# Altium PCB B车模摄像头.PcbDoc (part 1 of 2)
Units mil, origin at the board's own origin, x right, y up, seen from the top; angles counter-clockwise.
Board outline 3935.06 x 1885.03 mil, 2 copper layers (Top Layer, Bottom Layer); 34 components, 50 nets, 260 pads, 36 vias.
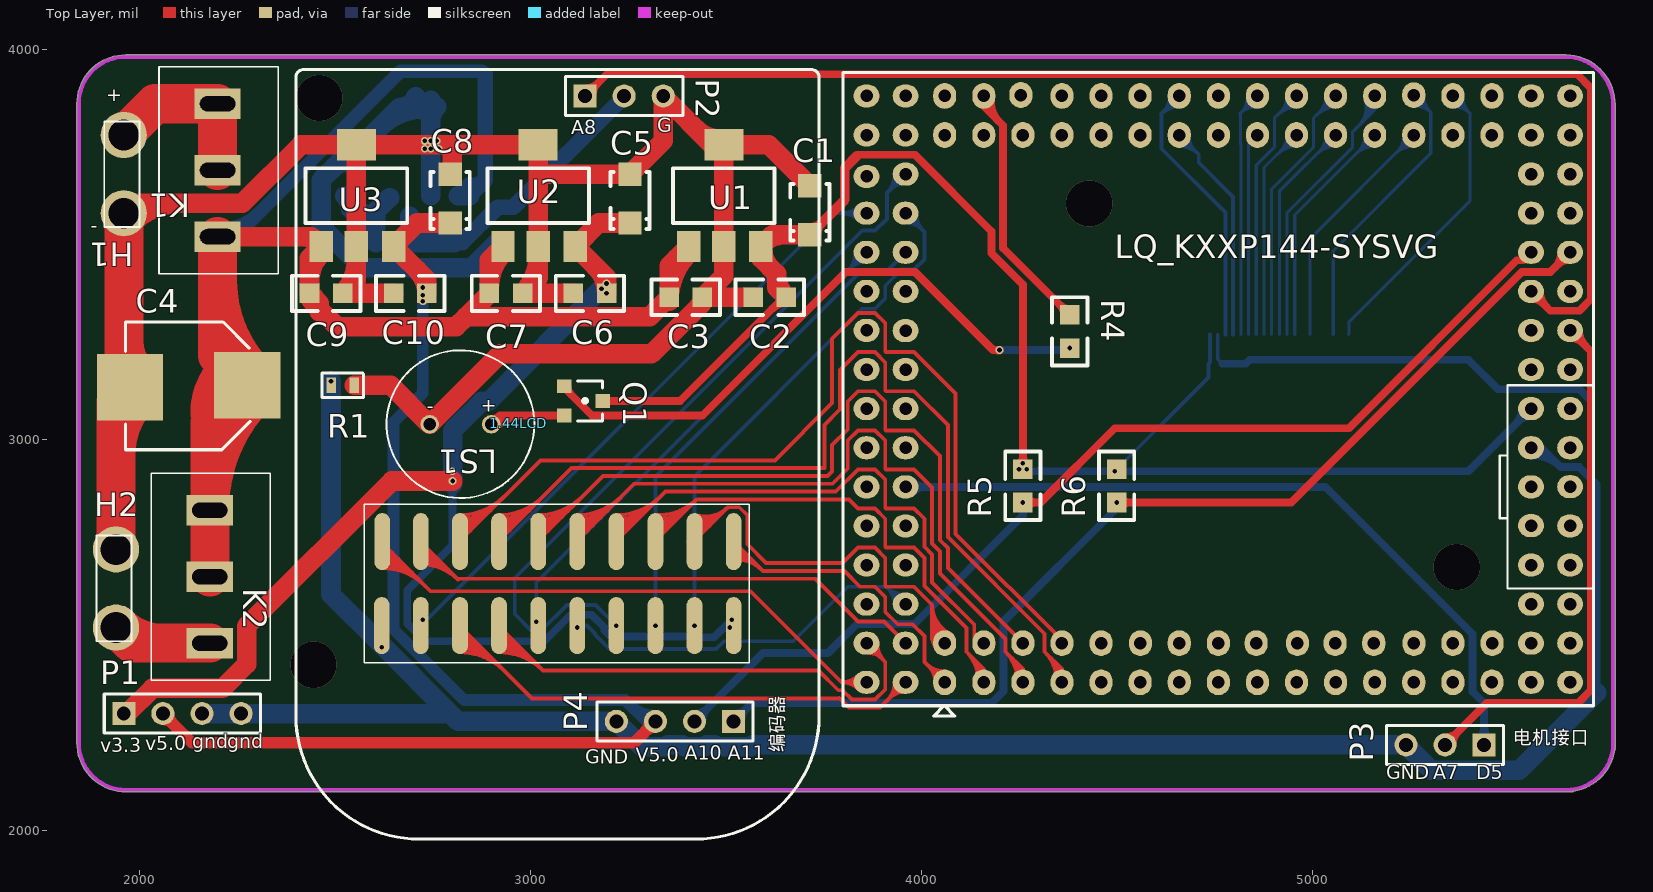
[diagram p0: Top Layer view]
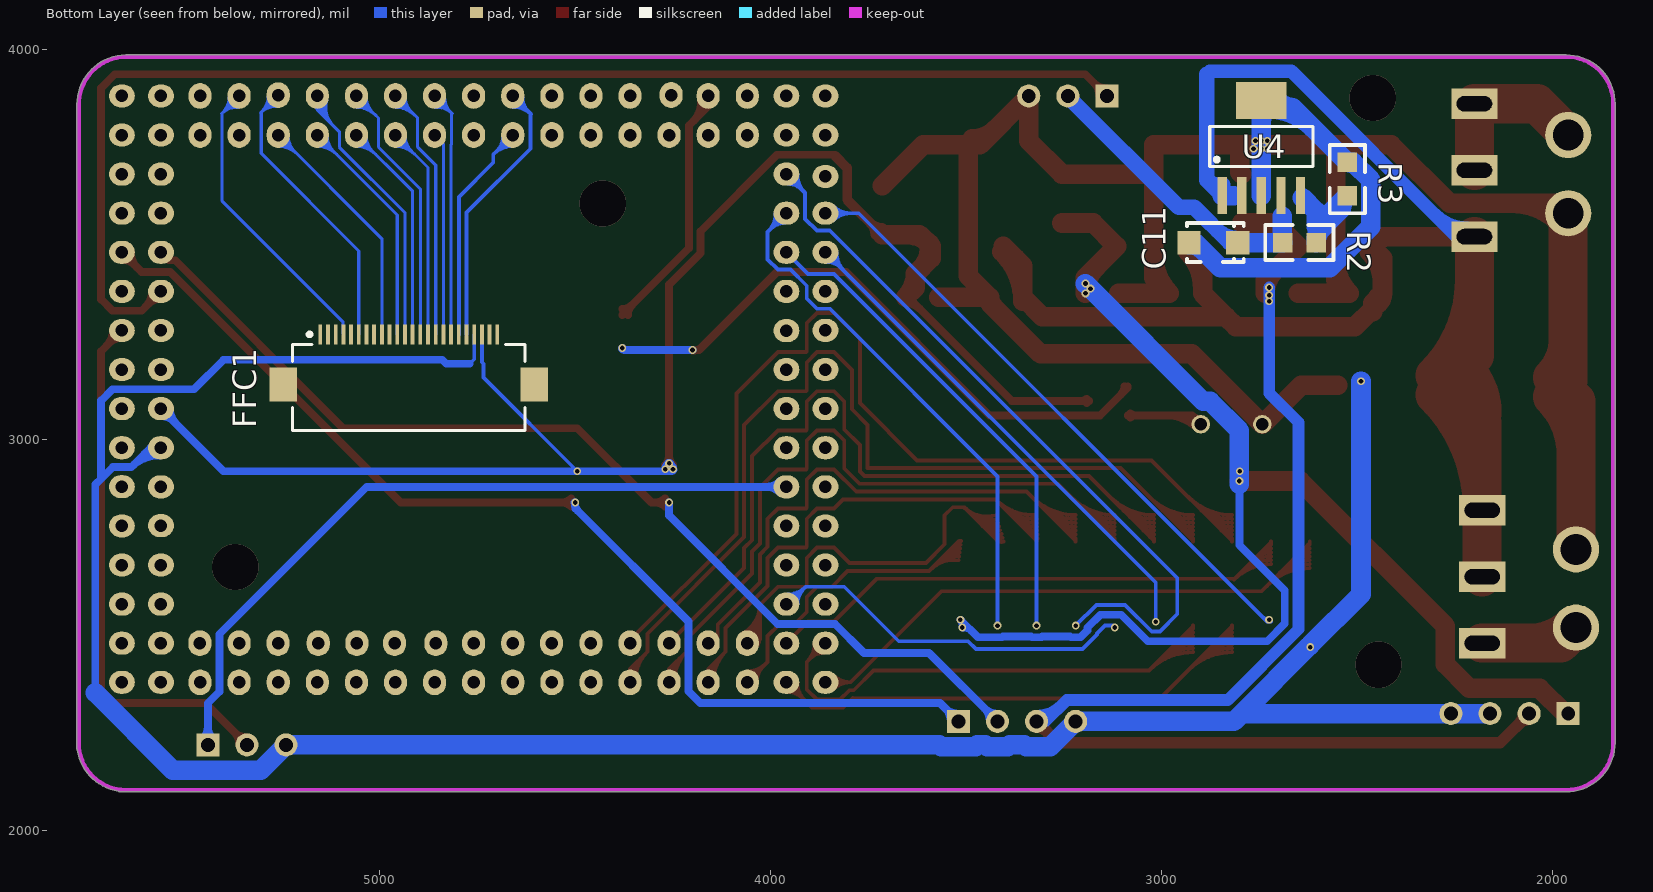
[diagram p1: Bottom Layer view, seen from below]

## Layer stack, top to bottom
Top Layer: signal copper 1.4
Dielectric: dielectric 12.6, FR-4, Dk 4.8
Bottom Layer: signal copper 1.4

## Board outline
1839.98,2225 1839.98,3860 cw(c1965,3860) 1965,3985.01 5650,3985.01 cw(c5650,3980) 5650.1,3985.01 cw(c5647.5,3857.5) 5775.04,3857.5 cw(c5647.5,3857.5) 5775.02,3854.95 cw(c5647.5,3857.5) 5775.01,3854.9 5775.02,3855 5775.02,2210 cw(c5770,2210) 5773.65,2206.56 cw(c5650,2225) 5668.44,2101.35 cw(c5665,2105) 5665,2099.99 1965,2099.99 cw(c1965,2225)

## Design rules (kind name [scope] priority, off if disabled: settings)
Clearance [All] p1: gap=10
PolygonConnect [All] p1: connectstyle=Relief reliefconductorwidth=10 reliefentries=4 polygonreliefangle="90 Angle"
RoutingVias [All] p1: holewidth=28 width=50 viastyle="Through Hole" minholewidth=28 minwidth=50 maxholewidth=28 maxwidth=50
SilkscreenOverComponentPads [All] p1: minsilkscreentomaskgap=10
SolderMaskExpansion [All] p1: expansion=4
TestPointUsage [All] p1: valid=0 allowmultiple=FALSE
Testpoint [All] p1: side=15 testpointundercomponent=TRUE minsize=40 maxsize=100 preferedsize=60 minholesize=0 maxholesize=40 preferedholesize=32 testpointgrid=1 style=1023 order=0-112345678
Width [All] p1: maxlimit=100 minlimit=8 preferedwidth=10
23 further rules are at their usual default settings.

## Components (designator, comment, footprint, x,y, rotation, side; value= is the part's Value field where it differs from the comment)
1.44LCD "1.44LCD" 1.44LCD 2400,1980 r0 top
C1 "47uF" 3216 3715,3525 r90 top
C2 "0.1uF" 0805 3655,3365 r180 top
C3 "0.1uF" 0805 3355,3365 r0 top
C4 "Cap Pol1" 470UF 2120,3140 r0 top
C5 "47uF" 3216 3255,3555 r90 top
C6 "0.1uF" 0805 3195,3375 r180 top
C7 "0.1uF" 0805 2895,3375 r0 top
C8 "47uF" 3216 2795,3555 r90 top
C9 "0.1uF" 0805 2435,3375 r0 top
C10 "0.1uF" 0805 2735,3375 r180 top
C11 "10uF" 3216 2805,3505 r0 bottom
FFC1 "FFC_0.5_24" 摄像头软排 4940,3140 r0 bottom
H1 "电源端子" 端子 1960,3580 r90 top (schematic designator *H1)
H2 "电机端子" 端子 1940,2520 r90 top (schematic designator *H2)
K1 "钮子开关" 钮子开关 2200,3860 r270 top
K2 "钮子开关" 钮子开关 2180,2820 r270 top
LQ_KXXP144-SYSVG "LQ_KXXP144-SYSVG" LQ_KXXP144-SYSVG 4060,2380 r0 top
LS1 "0905小型蜂鸣器" 0905小型蜂鸣器 2900,3040 r180 top
P1 "Header 4" HDR1X4 1960,2300 r0 top
P2 "Header 3" HDR1X3 3140,3880 r0 top
P3 "MOTO" HDR1X3 5440,2220 r180 top
P4 "编码器" HDR1X4 3520,2280 r180 top
Q1 "npn" npn 3180,3100 r270 top
R1 "R-0603" "R-0603 - duplicate1" 2520,3140 r0 top
R2 "3.3k" 0805 2605,3505 r0 bottom
R3 "1k" 0805 2525,3625 r90 bottom
R4 "1k" 0805 4380,3320 r270 top
R5 "10k" 0805 4260,2840 r90 top
R6 "10k" 0805 4500,2840 r90 top
U1 "LM2940S-3.3" LM2940S-5.0 3495,3625 r0 top
U2 "LM2940S-3.3" LM2940S-5.0 3020,3625 r0 top
U3 "LM2940S-5.0" LM2940S-5.0 2555,3625 r0 top
U4 "TL1963" SOT223-5 2745,3625 r180 bottom

## Footprints (in the part's own frame and the unit in brackets; to place one, negate y for a bottom-side part, rotate by r counter-clockwise, add the part's x,y. Pads: shape width x height; smd on the part's side, far side on the other; paste and mask are expansions set on the pad)
1.44LCD [mm]
  round 0 all layers, no hole: 0(5,3.989) 0(5,8.989) 0(29,3.989) 0(29,8.989)
  round 0.2 on Mech1: 1(0,49.489) 1(0.005,49.475) 1(0.5,49.989) 1(0.505,49.975)
  round 0 on Mech1: 1(5.07,20.597)
  oval 1.02x3.7 smd: 1(5.618,19.304) 2(8.128,19.304) 3(10.668,19.304) 4(13.208,19.304) 5(15.748,19.304) 6(18.288,19.304) 7(20.828,19.304) 8(23.368,19.304) 9(25.908,19.304) 10(28.448,19.304) 11(5.588,13.843) 12(8.128,13.843) 13(10.668,13.843) 14(13.208,13.843) 15(15.748,13.843) 16(18.288,13.843) 17(20.828,13.843) 18(23.368,13.843) 19(25.908,13.843) 20(28.448,13.843)
  silkscreen extent 0,-0.02 34,49.98
470UF [mm]
  rect 4.3x4.3 smd: 1(3.962,0) 2(-3.658,-0.127)
  silkscreen extent -3.96,-4.19 4.15,4.11, body extent -5,-4.41 4.7,4.09, height 10.3
0805 [mil]
  rect 50x50 smd: 1(0,0) 2(85,0)
  silkscreen extent -45,-45 130,45
0905小型蜂鸣器 [mm] "0905小蜂鸣器"
  round 1.2 hole 0.8: 1(0,0) 2(4,0)
  silkscreen extent -2.8,-4.81 6.8,4.79
3216 [mil]
  rect 60x60 smd: 1(0,0) 2(125,0)
  silkscreen extent -15,-50 130,50
HDR1X3 [mm] "Connector; Header; 3 Position"
  rect 1.5x1.5 hole 0.9: 1(0,0)
  round 1.5 hole 0.9: 2(2.54,0) 3(5.08,0)
  silkscreen extent -1.27,-1.27 6.35,1.27
HDR1X4 [mm] "Connector; Header; 4 Position"
  rect 1.5x1.5 hole 0.9: 1(0,0)
  round 1.5 hole 0.9: 2(2.54,0) 3(5.08,0) 4(7.62,0)
  silkscreen extent -1.27,-1.27 8.89,1.27
LM2940S-5.0 [mil]
  rect 60x80 smd: 1(-90,-130) 2(0,-130) 3(95,-130)
  rect 100x80 smd: 4(0,130)
  silkscreen extent -130,-70 130,70
LQ_KXXP144-SYSVG [mil]
  oval 59x66 hole 32: 1(0,0) 2(0,100) 3(100,0) 4(100,100) 5(200,0) 6(200,100) 7(300,0) 8(300,100) 9(400,0) 10(400,100) 11(500,0) 12(500.79,100) 13(600,0) 14(600,100) 15(700,0) 16(700,100) 17(800,0) 18(796.85,100) 19(900,0) 20(902.36,100) 21(1000,0) 22(998.82,100) 23(1100,0) 24(1097.64,100) 25(1200,0) 26(1200.39,100) 27(1300,0) 28(1300,100) 29(1400,0) 30(1400.39,100) 63(1400,1500) 64(1400,1400) 65(1300,1500) 66(1300,1400) 67(1200,1501.97) 68(1200,1400) 69(1100,1500) 70(1100,1400) 71(1000,1500) 72(1000,1400) 73(900,1500) 74(900,1400) 75(800,1500) 76(800,1400) 77(700,1500) 78(700,1400) 79(600,1500) 80(600,1400) 81(500,1500) 82(500,1400) 83(400,1500) 84(400,1400) 85(300,1500) 86(300,1400) 87(194.88,1502.36) 88(200,1400) 89(100,1500) 90(100,1400) 91(0,1500) 92(0,1400)
  oval 66x59 hole 32: 31(1500,0) 32(1600,0) 33(1500,100) 34(1600,100) 35(1500,200) 36(1600,200) 37(1500,300) 38(1600,300) 39(1500,400.79) 40(1600,400) 41(1500,500) 42(1600,500.39) 43(1500,600) 44(1600,600) 45(1500,700) 46(1600,700) 47(1500,800) 48(1600,800) 49(1500,900) 50(1600,900) 51(1500,1000) 52(1600,1000) 53(1500,1100) 54(1600,1100) 55(1500,1200) 56(1600,1200) 57(1500,1300) 58(1600,1300) 59(1500,1400) 60(1600,1400) 61(1500,1500) 62(1600,1500) 93(-100,1500) 94(-200,1500) 95(-100,1400) 96(-200,1400) 97(-100,1300) 98(-200,1294.09) 99(-100,1200) 100(-200,1200) 101(-100,1100) 102(-200,1100) 103(-100,1000) 104(-200,1000) 105(-100,899.61) 106(-200,900.39) 107(-100,800) 108(-200,800) 109(-100,700) 110(-200,700) 111(-100,600) 112(-200,600) 113(-100,500) 114(-200,500) 115(-100,400) 116(-200,400) 117(-100,300) 118(-200,300) 119(-100,200) 120(-200,200) 121(-100,100) 122(-200,100) 123(-100,0) 124(-200,0)
  silkscreen extent -260,-87 1660,1560
npn [mm]
  rect 0.9x0.95 smd: 1(0,0.127) 2(-0.95,-2.373) 3(0.95,-2.373)
  silkscreen extent -1.3,-1.5 1.3,0.13
"R-0603 - duplicate1" [mm]
  rect 0.6x1 smd: 1(-0.75,0) 2(0.75,0)
  silkscreen extent -1.35,-0.8 1.35,0.8
SOT223-5 [mm]
  rect 0.6x2.4 smd: 1(-2.54,0) 2(-1.27,0) 3(0,0) 4(1.27,0) 5(2.54,0)
  rect 3.3x2.4 smd: 6(0,6.181)
  silkscreen extent -3.35,1.88 3.35,4.48, body extent -3.28,-0.43 3.27,6.83, height 2.05
摄像头软排 [mm]
  rect 1.8x2.2 smd: 0(-8.514,-0.051) 0(7.802,-0.051)
  rect 0.25x1.3 smd: 1(5.394,-3.301) 2(4.894,-3.301) 3(4.394,-3.301) 4(3.894,-3.301) 5(3.394,-3.301) 6(2.894,-3.301) 7(2.394,-3.301) 8(1.894,-3.301) 9(1.394,-3.301) 10(0.894,-3.301) 11(0.394,-3.301) 12(-0.106,-3.301) 13(-0.606,-3.301) 14(-1.106,-3.301) 15(-1.606,-3.301) 16(-2.106,-3.301) 17(-2.606,-3.301) 18(-3.106,-3.301) 19(-3.606,-3.301) 20(-4.106,-3.301) 21(-4.606,-3.301) 22(-5.106,-3.301) 23(-5.606,-3.301) 24(-6.106,-3.301)
  silkscreen extent -7.91,-3.43 7.19,2.95, body extent -9.11,-3.08 8.39,2.25, height 2.08
端子 [mm]
  round 3 hole 2: 1(0,0) 2(5.08,0)
  silkscreen extent -0.89,-1.02 5.97,1.27
钮子开关 [mm] "102"
  rect 2x3 hole 1 slot 2.3 at 90 deg: 1(0,0) 2(4.318,0) 3(8.636,0)
  silkscreen extent -2.41,-3.81 11.05,3.94

## Part data
C1 C5 C8: library part CAP-TAN-47uF
C2 C3 C6 C7 C9 C10: library part CAP-0805_1
C4: "Polarized Capacitor (Radial)"
C11: library part CAP-TAN-10uF
FFC1: "FFC"
H1 H2: library part 端子5MM
K1 K2: "钮子开关102"
LS1: "0905小蜂鸣器"
P1: "Header, 4-Pin"
P2: "Header, 3-Pin"
P3: library part "Header 3", "Header, 3-Pin"
P4: library part "Header 4", "Header, 4-Pin"
R2 R3 R4 R5 R6: library part RES-0805
U1 U2: library part LM2940S-5.0

## Via types
v1: diameter 20, hole 12, Top Layer to Bottom Layer, 32 vias
v2: diameter 118.11, hole 118.11, Top Layer to Bottom Layer, 4 vias

## Nets (pads, with @x,y where several pads share a name; then routed paths per layer and width w, separated by ;. In a path a pad name is that pad's centre, name@x,y a point inside that pad or via, vN(x,y) a via of type N, cw(c..) or ccw(c..) an arc to the next point about the centre after c; other vN are vias at no path point)
AGND: C1.2 C2.2 C3.2 C4.2 C5.2 C6.2 C7.2 C8.2 C9.2 C10.2 C11.2 H1.1 H2.2 LS1.2 P2.3 R1.2 R3.2 U1.2 U1.4 U2.2 U2.4 U3.2 U3.4 U4.3 U4.6 | length 10305.7
  Top Layer w50: H1.1@1960,3580 1985,3605 2262.92,3605 2412.92,3755 U3.4@2555,3755 ; R1.2@2549.53,3140 2642.52,3140 LS1.2@2742.52,3040 2922.52,3220 3309.5,3220 3440,3350.5 C3.2@3440,3365 ; C10.2@2650,3375 C9.2@2520,3375 ; C8.2@2795,3680 2800,3685 2800,3755 ; C6.2@3110,3375 C7.2@2980,3375 ; C2.2@3570,3365 C3.2@3440,3365 ; C1.2@3715,3650 3610,3755 U1.4@3495,3755 ; H1.1@1984.08,3555.92 cw(c2102.57,3437.43) 2102.57,3605 ; H1.1@1984.08,3555.92 cw(c2102.57,3437.43) 2102.57,3605 ; H1.1@1984.08,3555.92 cw(c2102.57,3437.43) 2102.57,3605 ; C9.2@2520,3375 ccw(c2435.5,3459.5) U3.2@2555,3459.5 ; C9.2@2520,3375 ccw(c2435.5,3459.5) U3.2@2555,3459.5 ; C9.2@2520,3375 ccw(c2435.5,3459.5) U3.2@2555,3459.5 ; C9.2@2520,3375 2555,3410 U3.2@2555,3495 U3.4@2555,3755 ; U3.4@2555,3755 2800,3755 ; 2800,3755 U2.4@3020,3755 3020,3670 ; C7.2@2980,3375 ccw(c2883.43,3471.57) U2.2@3020,3471.57 ; C7.2@2980,3375 ccw(c2883.43,3471.57) U2.2@3020,3471.57 ; C7.2@2980,3375 ccw(c2883.43,3471.57) U2.2@3020,3471.57 ; C7.2@2980,3375 3020,3415 U2.2@3020,3495 3020,3670 ; 3020,3670 3030,3680 C5.2@3255,3680 3340,3765 P2.3@3340,3880 3465,3755 U1.4@3495,3755 ; 3425.25,3794.75 ccw(c3485,3854.5) U1.4@3485,3770 ; 3425.25,3794.75 ccw(c3485,3854.5) U1.4@3485,3770 ; 3425.25,3794.75 ccw(c3485,3854.5) U1.4@3485,3770 ; C3.2@3429.75,3340.25 ccw(c3405,3365) C3.2@3440,3365 ; C3.2@3429.75,3340.25 ccw(c3405,3365) C3.2@3440,3365 ; C3.2@3429.75,3340.25 ccw(c3405,3365) C3.2@3440,3365 ; C3.2@3440,3365 3495,3420 U1.2@3495,3495 U1.4@3495,3755
  Top Layer w100: H2.2@1935,2715 H2.2@1940,2720 1940,3099 C4.2@1976,3135 1960,3151 H1.1@1960,3580 ; 1940,2964.45 cw(c2146.55,2964.45) C4.2@2000.5,3110.5 ; 1940,2964.45 cw(c2146.55,2964.45) C4.2@2000.5,3110.5 ; 1940,2964.45 cw(c2146.55,2964.45) C4.2@2000.5,3110.5 ; 1960,3257.27 ccw(c2098.27,3257.27) C4.2@2000.5,3159.5 ; 1960,3257.27 ccw(c2098.27,3257.27) C4.2@2000.5,3159.5 ; 1960,3257.27 ccw(c2098.27,3257.27) C4.2@2000.5,3159.5
  Bottom Layer w50: U4.3@2745,3625 U4.6@2745,3868.35 2726.65,3850 2665,3850 ; C11.2@2930,3505 2914.5,3505 2849.5,3440 2570.5,3440 2465,3545.5 2465,3664.5 2510.5,3710 R3.2@2525,3710 ; R3.2@2500.25,3699.75 cw(c2525,3675) R3.2@2525,3710 ; R3.2@2500.25,3699.75 cw(c2525,3675) R3.2@2525,3710 ; R3.2@2500.25,3699.75 cw(c2525,3675) R3.2@2525,3710 ; R3.2@2525,3710 2665,3850 ; 2614.31,3799.31 cw(c2727.28,3686.33) U4.6@2727.28,3846.1 ; 2614.31,3799.31 cw(c2727.28,3686.33) U4.6@2727.28,3846.1 ; 2614.31,3799.31 cw(c2727.28,3686.33) U4.6@2727.28,3846.1 ; 2643.03,3828.03 cw(c2697.6,3773.46) U4.6@2720.64,3847.12 ; 2643.03,3828.03 cw(c2697.6,3773.46) U4.6@2720.64,3847.12 ; 2643.03,3828.03 cw(c2697.6,3773.46) U4.6@2720.64,3847.12 ; 2665,3850 ccw(c2665,3895.83) U4.6@2706.93,3877.33 ; 2665,3850 ccw(c2665,3895.83) U4.6@2706.93,3877.33 ; 2665,3850 ccw(c2665,3895.83) U4.6@2706.93,3877.33 ; U4.6@2729.27,3852.62 cw(c2691.3,3814.64) 2745,3814.64 ; U4.6@2729.27,3852.62 cw(c2691.3,3814.64) 2745,3814.64 ; U4.6@2729.27,3852.62 cw(c2691.3,3814.64) 2745,3814.64 ; 2745,3814.64 cw(c2798.7,3814.64) U4.6@2760.73,3852.62 ; 2745,3814.64 cw(c2798.7,3814.64) U4.6@2760.73,3852.62 ; 2745,3814.64 cw(c2798.7,3814.64) U4.6@2760.73,3852.62 ; 2895,3485.5 cw(c2930,3450.5) C11.2@2930,3500 ; 2895,3485.5 cw(c2930,3450.5) C11.2@2930,3500 ; 2895,3485.5 cw(c2930,3450.5) C11.2@2930,3500
  other v1: 2730,3745 2745,3745 2765,3745 2730,3765 2745,3765 2760,3765
DGND: 1.44LCD.11 FFC1.21 LQ_KXXP144-SYSVG.43 P1.3 P1.4 P3.3 P4.4 R1.1 | length 7055.5
  Bottom Layer w8: FFC1.21@4758.68,3269.98 4758.68,3206.32 4770,3195
  Bottom Layer w10: LQ_KXXP144-SYSVG.43@5557.65,2989.41 LQ_KXXP144-SYSVG.43@5560,2990
  Bottom Layer w20: 4770,3195 4830,3195 4840.33,3205.33 5399.67,3205.33 5475.5,3129.5 5684,3129.5 5713,3100.5 5713,2900.9 ; LQ_KXXP144-SYSVG.43@5560,2980 5586.5,2980 5636,2930.5 5683.4,2930.5 5713,2900.9 ; 5728,2353.28 5728,2885.9 5713,2900.9 ; LQ_KXXP144-SYSVG.43@5563.5,2960.5 cw(c5563.5,2857.9) 5636.05,2930.45 ; LQ_KXXP144-SYSVG.43@5563.5,2960.5 cw(c5563.5,2857.9) 5636.05,2930.45 ; LQ_KXXP144-SYSVG.43@5563.5,2960.5 cw(c5563.5,2857.9) 5636.05,2930.45 ; LQ_KXXP144-SYSVG.43@5563.5,2980.5 cw(c5563.5,2926.19) 5601.9,2964.59 ; LQ_KXXP144-SYSVG.43@5563.5,2980.5 cw(c5563.5,2926.19) 5601.9,2964.59 ; LQ_KXXP144-SYSVG.43@5563.5,2980.5 cw(c5563.5,2926.19) 5601.9,2964.59
  Bottom Layer w50: P1.3@2160,2300 P1.4@2260,2300 2795,2300 ; v1(2490,3150) 2490,3135 2490,2605 v1@2620,2475 ; v1@2622.5,2472.5 2795,2300 ; P3.3@5220,2220 3568.55,2220 3564.03,2215.47 3475.97,2215.47 3471.45,2220 3451.26,2220 3446.73,2215.47 3393.27,2215.47 3388.74,2220 3351.26,2220 3346.73,2215.47 3284.53,2215.47 P4.4@3220,2280 2815,2280 2795,2300 ; P3.3@5240,2220 5304.53,2155.47 5530.19,2155.47 5728,2353.28
  other v1: 2620,2470
Net*H1_2: H1.2 K1.1 K1.2 | length 443.1
  Top Layer w100: H1.2@1960,3780 2040,3860 K1.1@2200,3860 K1.2@2200,3690
NetC1_2: 
NetLS1_VCC: LS1.1 Q1.3 | length 688.5
  Top Layer w20: LS1.1@2900,3040 2922.6,3062.6 Q1.3@3086.57,3062.6 ; LS1.1@2895.49,3044.51 cw(c2939.16,3000.84) 2939.16,3062.6 ; LS1.1@2895.49,3044.51 cw(c2939.16,3000.84) 2939.16,3062.6 ; LS1.1@2895.49,3044.51 cw(c2939.16,3000.84) 2939.16,3062.6 ; LS1.1@2909.63,3030.37 cw(c2987.44,2952.56) 2987.44,3062.6 ; LS1.1@2909.63,3030.37 cw(c2987.44,2952.56) 2987.44,3062.6 ; LS1.1@2909.63,3030.37 cw(c2987.44,2952.56) 2987.44,3062.6 ; 3066.96,3062.6 cw(c3066.96,3043.97) Q1.3@3080.13,3057.14 ; 3066.96,3062.6 ccw(c3066.96,3081.23) Q1.3@3080.13,3068.05 ; 3066.96,3062.6 cw(c3066.96,3043.97) Q1.3@3080.13,3057.14 ; 3066.96,3062.6 ccw(c3066.96,3081.23) Q1.3@3080.13,3068.05 ; 3066.96,3062.6 cw(c3066.96,3043.97) Q1.3@3080.13,3057.14 ; 3066.96,3062.6 ccw(c3066.96,3081.23) Q1.3@3080.13,3068.05
NetQ1_2: Q1.2 R4.2 | length 1745.2
  Top Layer w20: Q1.2@3086.57,3137.4 3086.57,3133.72 3158.01,3062.28 3439.78,3062.28 3807,3429.5 3984,3429.5 4183.5,3230 v1(4200,3230) ; Q1.2@3095.28,3137.4 ccw(c3125.16,3137.4) 3104.03,3116.27 ; Q1.2@3095.28,3137.4 ccw(c3125.16,3137.4) 3104.03,3116.27 ; Q1.2@3095.28,3137.4 ccw(c3125.16,3137.4) 3104.03,3116.27 ; 4175.25,3238.25 ccw(c4200,3263) v1@4200,3228 ; 4175.25,3238.25 ccw(c4200,3263) v1@4200,3228 ; 4175.25,3238.25 ccw(c4200,3263) v1@4200,3228
  Bottom Layer w20: v1(4200,3230) 4375,3230 v1(4380,3235) ; v1@4372.76,3230 ccw(c4372.76,3242.24) v1@4381.41,3233.59 ; v1@4372.76,3230 ccw(c4372.76,3242.24) v1@4381.41,3233.59 ; v1@4372.76,3230 ccw(c4372.76,3242.24) v1@4381.41,3233.59
NetR2_1: R2.1 R3.1 U4.5 | length 924.6
  Bottom Layer w20: R3.1@2525,3625 2525,3585 R2.1@2605,3505 ; R3.1@2514.39,3614.39 cw(c2488.79,3588.79) 2525,3588.79 ; R3.1@2514.39,3614.39 cw(c2488.79,3588.79) 2525,3588.79 ; R3.1@2514.39,3614.39 cw(c2488.79,3588.79) 2525,3588.79 ; 2525,3588.79 cw(c2561.21,3588.79) R3.1@2535.61,3614.39 ; 2525,3588.79 cw(c2561.21,3588.79) R3.1@2535.61,3614.39 ; 2525,3588.79 cw(c2561.21,3588.79) R3.1@2535.61,3614.39 ; 2579.39,3530.61 cw(c2553.79,3505) R2.1@2590,3505 ; 2579.39,3530.61 ccw(c2605,3556.21) R2.1@2605,3520 ; 2579.39,3530.61 cw(c2553.79,3505) R2.1@2590,3505 ; 2579.39,3530.61 ccw(c2605,3556.21) R2.1@2605,3520 ; 2579.39,3530.61 cw(c2553.79,3505) R2.1@2590,3505 ; 2579.39,3530.61 ccw(c2605,3556.21) R2.1@2605,3520
  Bottom Layer w50: R3.1@2525,3625 2605,3545 2605,3585 U4.5@2640,3620 ; 2576.72,3573.28 cw(c2508.43,3505) R2.1@2605,3505 ; 2576.72,3573.28 cw(c2508.43,3505) R2.1@2605,3505 ; 2576.72,3573.28 cw(c2508.43,3505) R2.1@2605,3505
PTA7: LQ_KXXP144-SYSVG.50 P3.2 | length 1817.2
  Top Layer w20: P3.2@5340,2220 5447,2327 5680.5,2327 5713,2359.5 5713,3227 LQ_KXXP144-SYSVG.50@5660,3280 ; P3.2@5340,2239.53 ccw(c5340,2286.67) 5373.34,2253.34 ; P3.2@5340,2239.53 ccw(c5340,2286.67) 5373.34,2253.34 ; P3.2@5340,2239.53 ccw(c5340,2286.67) 5373.34,2253.34 ; P3.2@5359.53,2220 cw(c5406.67,2220) 5373.34,2253.34 ; P3.2@5359.53,2220 cw(c5406.67,2220) 5373.34,2253.34 ; P3.2@5359.53,2220 cw(c5406.67,2220) 5373.34,2253.34 ; LQ_KXXP144-SYSVG.50@5663.5,3260.5 cw(c5663.5,3221.87) 5690.81,3249.19 ; LQ_KXXP144-SYSVG.50@5663.5,3260.5 cw(c5663.5,3221.87) 5690.81,3249.19 ; LQ_KXXP144-SYSVG.50@5663.5,3260.5 cw(c5663.5,3221.87) 5690.81,3249.19 ; LQ_KXXP144-SYSVG.50@5683,3280 ccw(c5738.53,3280) 5699.26,3240.74 ; LQ_KXXP144-SYSVG.50@5683,3280 ccw(c5738.53,3280) 5699.26,3240.74 ; LQ_KXXP144-SYSVG.50@5683,3280 ccw(c5738.53,3280) 5699.26,3240.74
PTA8: LQ_KXXP144-SYSVG.51 P2.1 | length 3780.9
  Top Layer w20: P2.1@3140,3880 3195.36,3935.36 5678.14,3935.36 5713,3900.5 5713,3359.5 5684,3330.5 5609.5,3330.5 LQ_KXXP144-SYSVG.51@5560,3380 ; P2.1@3140,3899.53 ccw(c3140,3946.67) 3173.34,3913.34 ; P2.1@3140,3899.53 ccw(c3140,3946.67) 3173.34,3913.34 ; P2.1@3140,3899.53 ccw(c3140,3946.67) 3173.34,3913.34 ; P2.1@3159.53,3880 cw(c3206.67,3880) 3173.34,3913.34 ; P2.1@3159.53,3880 cw(c3206.67,3880) 3173.34,3913.34 ; P2.1@3159.53,3880 cw(c3206.67,3880) 3173.34,3913.34 ; LQ_KXXP144-SYSVG.51@5563.5,3360.5 cw(c5563.5,3321.87) 5590.81,3349.19 ; LQ_KXXP144-SYSVG.51@5563.5,3360.5 cw(c5563.5,3321.87) 5590.81,3349.19 ; LQ_KXXP144-SYSVG.51@5563.5,3360.5 cw(c5563.5,3321.87) 5590.81,3349.19 ; LQ_KXXP144-SYSVG.51@5583,3380 ccw(c5638.53,3380) 5599.26,3340.74 ; LQ_KXXP144-SYSVG.51@5583,3380 ccw(c5638.53,3380) 5599.26,3340.74 ; LQ_KXXP144-SYSVG.51@5583,3380 ccw(c5638.53,3380) 5599.26,3340.74
PTA10: LQ_KXXP144-SYSVG.53 P4.2 R5.1 | length 3049.5
  Top Layer w20: v1(4260,2840) 4305,2840 4495,3030 5094.07,3030 5523.57,3459.5 5539.5,3459.5 LQ_KXXP144-SYSVG.53@5560,3480 ; R5.1@4270.61,2829.39 cw(c4296.21,2803.79) 4296.21,2840 ; R5.1@4270.61,2829.39 cw(c4296.21,2803.79) 4296.21,2840 ; R5.1@4270.61,2829.39 cw(c4296.21,2803.79) 4296.21,2840 ; R5.1@4270.61,2850.61 ccw(c4296.21,2876.21) 4296.21,2840 ; R5.1@4270.61,2850.61 ccw(c4296.21,2876.21) 4296.21,2840 ; R5.1@4270.61,2850.61 ccw(c4296.21,2876.21) 4296.21,2840
  Bottom Layer w20: P4.2@3420,2280 3595,2455 3761.5,2455 3836,2529.5 3983,2529.5 4260,2806.5 v1(4260,2840) ; P4.2@3420,2299.53 ccw(c3420,2346.67) 3453.34,2313.34 ; P4.2@3420,2299.53 ccw(c3420,2346.67) 3453.34,2313.34 ; P4.2@3420,2299.53 ccw(c3420,2346.67) 3453.34,2313.34 ; P4.2@3439.53,2280 cw(c3486.67,2280) 3453.34,2313.34 ; P4.2@3439.53,2280 cw(c3486.67,2280) 3453.34,2313.34 ; P4.2@3439.53,2280 cw(c3486.67,2280) 3453.34,2313.34
PTA11: LQ_KXXP144-SYSVG.54 P4.1 R6.1 | length 3439
  Top Layer w20: v1(4500,2840) 4946.5,2840 5536,3429.5 5609.5,3429.5 LQ_KXXP144-SYSVG.54@5660,3480 ; R6.1@4510.61,2829.39 cw(c4536.21,2803.79) 4536.21,2840 ; R6.1@4510.61,2829.39 cw(c4536.21,2803.79) 4536.21,2840 ; R6.1@4510.61,2829.39 cw(c4536.21,2803.79) 4536.21,2840 ; R6.1@4510.61,2850.61 ccw(c4536.21,2876.21) 4536.21,2840 ; R6.1@4510.61,2850.61 ccw(c4536.21,2876.21) 4536.21,2840 ; R6.1@4510.61,2850.61 ccw(c4536.21,2876.21) 4536.21,2840 ; 5620.74,3440.74 ccw(c5581.47,3480) LQ_KXXP144-SYSVG.54@5637,3480 ; 5620.74,3440.74 ccw(c5581.47,3480) LQ_KXXP144-SYSVG.54@5637,3480 ; 5620.74,3440.74 ccw(c5581.47,3480) LQ_KXXP144-SYSVG.54@5637,3480 ; 5629.19,3449.19 cw(c5656.5,3421.87) LQ_KXXP144-SYSVG.54@5656.5,3460.5 ; 5629.19,3449.19 cw(c5656.5,3421.87) LQ_KXXP144-SYSVG.54@5656.5,3460.5 ; 5629.19,3449.19 cw(c5656.5,3421.87) LQ_KXXP144-SYSVG.54@5656.5,3460.5
  Bottom Layer w20: P4.1@3520,2280 3567,2327 4180.5,2327 4210.5,2357 4210.5,2535.5 4500,2825 v1(4500,2840) ; P4.1@3520,2299.53 ccw(c3520,2346.67) 3553.34,2313.34 ; P4.1@3520,2299.53 ccw(c3520,2346.67) 3553.34,2313.34 ; P4.1@3520,2299.53 ccw(c3520,2346.67) 3553.34,2313.34 ; P4.1@3539.53,2280 cw(c3586.67,2280) 3553.34,2313.34 ; P4.1@3539.53,2280 cw(c3586.67,2280) 3553.34,2313.34 ; P4.1@3539.53,2280 cw(c3586.67,2280) 3553.34,2313.34 ; 4492.81,2817.81 ccw(c4470.62,2840) v1@4502,2840 ; 4492.81,2817.81 ccw(c4470.62,2840) v1@4502,2840 ; 4492.81,2817.81 ccw(c4470.62,2840) v1@4502,2840
PTA27: FFC1.4 LQ_KXXP144-SYSVG.65 | length 1209.5
  Bottom Layer w8: FFC1.4@5093.32,3269.98 5094.09,3270.74 5094.09,3301.37 5403.5,3610.78 5403.5,3836.5 LQ_KXXP144-SYSVG.65@5360,3880 ; LQ_KXXP144-SYSVG.65@5361.19,3859.04 cw(c5363.97,3818.36) 5392.81,3847.19 ; LQ_KXXP144-SYSVG.65@5361.19,3859.04 cw(c5363.97,3818.36) 5392.81,3847.19 ; LQ_KXXP144-SYSVG.65@5361.19,3859.04 cw(c5363.97,3818.36) 5392.81,3847.19 ; LQ_KXXP144-SYSVG.65@5361.74,3851.06 cw(c5365.56,3795.07) 5405.25,3834.75 ; LQ_KXXP144-SYSVG.65@5361.74,3851.06 cw(c5365.56,3795.07) 5405.25,3834.75 ; LQ_KXXP144-SYSVG.65@5361.74,3851.06 cw(c5365.56,3795.07) 5405.25,3834.75 ; LQ_KXXP144-SYSVG.65@5377.5,3876.5 ccw(c5411.3,3876.5) 5387.4,3852.6 ; LQ_KXXP144-SYSVG.65@5377.5,3876.5 ccw(c5411.3,3876.5) 5387.4,3852.6 ; LQ_KXXP144-SYSVG.65@5377.5,3876.5 ccw(c5411.3,3876.5) 5387.4,3852.6 ; LQ_KXXP144-SYSVG.65@5385.5,3876.5 ccw(c5438.61,3876.5) 5401.06,3838.94 ; LQ_KXXP144-SYSVG.65@5385.5,3876.5 ccw(c5438.61,3876.5) 5401.06,3838.94 ; LQ_KXXP144-SYSVG.65@5385.5,3876.5 ccw(c5438.61,3876.5) 5401.06,3838.94
PTA28: FFC1.9 LQ_KXXP144-SYSVG.68 | length 1109
  Bottom Layer w8: FFC1.9@4994.9,3269.98 4994.9,3514.9 LQ_KXXP144-SYSVG.68@5260,3780 ; 5210.49,3730.49 cw(c5260,3680.99) LQ_KXXP144-SYSVG.68@5260,3751 ; 5210.49,3730.49 cw(c5260,3680.99) LQ_KXXP144-SYSVG.68@5260,3751 ; 5210.49,3730.49 cw(c5260,3680.99) LQ_KXXP144-SYSVG.68@5260,3751 ; 5218.94,3738.94 ccw(c5181.39,3776.5) LQ_KXXP144-SYSVG.68@5234.5,3776.5 ; 5218.94,3738.94 ccw(c5181.39,3776.5) LQ_KXXP144-SYSVG.68@5234.5,3776.5 ; 5218.94,3738.94 ccw(c5181.39,3776.5) LQ_KXXP144-SYSVG.68@5234.5,3776.5 ; 5224.15,3744.15 cw(c5260,3708.3) LQ_KXXP144-SYSVG.68@5260,3759 ; 5224.15,3744.15 cw(c5260,3708.3) LQ_KXXP144-SYSVG.68@5260,3759 ; 5224.15,3744.15 cw(c5260,3708.3) LQ_KXXP144-SYSVG.68@5260,3759 ; 5232.6,3752.6 ccw(c5208.7,3776.5) LQ_KXXP144-SYSVG.68@5242.5,3776.5 ; 5232.6,3752.6 ccw(c5208.7,3776.5) LQ_KXXP144-SYSVG.68@5242.5,3776.5 ; 5232.6,3752.6 ccw(c5208.7,3776.5) LQ_KXXP144-SYSVG.68@5242.5,3776.5
PTA29: FFC1.6 LQ_KXXP144-SYSVG.67 | length 1186.3
  Bottom Layer w8: FFC1.6@5053.95,3269.98 5053.95,3483.45 5303.5,3733 5303.5,3838.47 LQ_KXXP144-SYSVG.67@5260,3881.97 ; LQ_KXXP144-SYSVG.67@5261.19,3861.01 cw(c5263.97,3820.32) 5292.81,3849.16 ; LQ_KXXP144-SYSVG.67@5261.19,3861.01 cw(c5263.97,3820.32) 5292.81,3849.16 ; LQ_KXXP144-SYSVG.67@5261.19,3861.01 cw(c5263.97,3820.32) 5292.81,3849.16 ; LQ_KXXP144-SYSVG.67@5261.74,3853.03 cw(c5265.56,3797.04) 5305.25,3836.72 ; LQ_KXXP144-SYSVG.67@5261.74,3853.03 cw(c5265.56,3797.04) 5305.25,3836.72 ; LQ_KXXP144-SYSVG.67@5261.74,3853.03 cw(c5265.56,3797.04) 5305.25,3836.72 ; LQ_KXXP144-SYSVG.67@5277.5,3878.47 ccw(c5311.3,3878.47) 5287.4,3854.57 ; LQ_KXXP144-SYSVG.67@5277.5,3878.47 ccw(c5311.3,3878.47) 5287.4,3854.57 ; LQ_KXXP144-SYSVG.67@5277.5,3878.47 ccw(c5311.3,3878.47) 5287.4,3854.57 ; LQ_KXXP144-SYSVG.67@5285.5,3878.47 ccw(c5338.61,3878.47) 5301.06,3840.91 ; LQ_KXXP144-SYSVG.67@5285.5,3878.47 ccw(c5338.61,3878.47) 5301.06,3840.91 ; LQ_KXXP144-SYSVG.67@5285.5,3878.47 ccw(c5338.61,3878.47) 5301.06,3840.91
PTB0: FFC1.11 LQ_KXXP144-SYSVG.70 | length 1083.9
  Bottom Layer w8: FFC1.11@4955.53,3269.98 4955.53,3575.53 LQ_KXXP144-SYSVG.70@5160,3780 ; 5110.49,3730.49 cw(c5160,3680.99) LQ_KXXP144-SYSVG.70@5160,3751 ; 5110.49,3730.49 cw(c5160,3680.99) LQ_KXXP144-SYSVG.70@5160,3751 ; 5110.49,3730.49 cw(c5160,3680.99) LQ_KXXP144-SYSVG.70@5160,3751 ; 5118.94,3738.94 ccw(c5081.39,3776.5) LQ_KXXP144-SYSVG.70@5134.5,3776.5 ; 5118.94,3738.94 ccw(c5081.39,3776.5) LQ_KXXP144-SYSVG.70@5134.5,3776.5 ; 5118.94,3738.94 ccw(c5081.39,3776.5) LQ_KXXP144-SYSVG.70@5134.5,3776.5 ; 5124.15,3744.15 cw(c5160,3708.3) LQ_KXXP144-SYSVG.70@5160,3759 ; 5124.15,3744.15 cw(c5160,3708.3) LQ_KXXP144-SYSVG.70@5160,3759 ; 5124.15,3744.15 cw(c5160,3708.3) LQ_KXXP144-SYSVG.70@5160,3759 ; 5132.6,3752.6 ccw(c5108.7,3776.5) LQ_KXXP144-SYSVG.70@5142.5,3776.5 ; 5132.6,3752.6 ccw(c5108.7,3776.5) LQ_KXXP144-SYSVG.70@5142.5,3776.5 ; 5132.6,3752.6 ccw(c5108.7,3776.5) LQ_KXXP144-SYSVG.70@5142.5,3776.5
PTB1: FFC1.12 LQ_KXXP144-SYSVG.69 | length 1524.3
  Bottom Layer w8: FFC1.12@4935.84,3269.98 4935.84,3581.3 5103.5,3748.96 5103.5,3788.52 5160,3845.02 LQ_KXXP144-SYSVG.69@5160,3880 ; 5119.24,3804.26 ccw(c5073.13,3850.37) LQ_KXXP144-SYSVG.69@5135.58,3869.16 ; 5119.24,3804.26 ccw(c5073.13,3850.37) LQ_KXXP144-SYSVG.69@5135.58,3869.16 ; 5119.24,3804.26 ccw(c5073.13,3850.37) LQ_KXXP144-SYSVG.69@5135.58,3869.16 ; 5128.71,3813.73 ccw(c5087.68,3854.75) LQ_KXXP144-SYSVG.69@5143.24,3871.46 ; 5128.71,3813.73 ccw(c5087.68,3854.75) LQ_KXXP144-SYSVG.69@5143.24,3871.46 ; 5128.71,3813.73 ccw(c5087.68,3854.75) LQ_KXXP144-SYSVG.69@5143.24,3871.46 ; 5138.17,3823.19 ccw(c5102.23,3859.13) LQ_KXXP144-SYSVG.69@5150.9,3873.76 ; 5138.17,3823.19 ccw(c5102.23,3859.13) LQ_KXXP144-SYSVG.69@5150.9,3873.76 ; 5138.17,3823.19 ccw(c5102.23,3859.13) LQ_KXXP144-SYSVG.69@5150.9,3873.76 ; 5147.63,3832.65 ccw(c5116.78,3863.5) LQ_KXXP144-SYSVG.69@5158.56,3876.07 ; 5147.63,3832.65 ccw(c5116.78,3863.5) LQ_KXXP144-SYSVG.69@5158.56,3876.07 ; 5147.63,3832.65 ccw(c5116.78,3863.5) LQ_KXXP144-SYSVG.69@5158.56,3876.07 ; 5157.1,3842.12 ccw(c5131.33,3867.88) LQ_KXXP144-SYSVG.69@5166.22,3878.37 ; 5157.1,3842.12 ccw(c5131.33,3867.88) LQ_KXXP144-SYSVG.69@5166.22,3878.37 ; 5157.1,3842.12 ccw(c5131.33,3867.88) LQ_KXXP144-SYSVG.69@5166.22,3878.37
PTB2: FFC1.13 LQ_KXXP144-SYSVG.72 | length 1058.8
  Bottom Layer w8: FFC1.13@4916.16,3269.98 4916.16,3636.16 LQ_KXXP144-SYSVG.72@5060,3780 ; 5010.49,3730.49 cw(c5060,3680.99) LQ_KXXP144-SYSVG.72@5060,3751 ; 5010.49,3730.49 cw(c5060,3680.99) LQ_KXXP144-SYSVG.72@5060,3751 ; 5010.49,3730.49 cw(c5060,3680.99) LQ_KXXP144-SYSVG.72@5060,3751 ; 5018.94,3738.94 ccw(c4981.39,3776.5) LQ_KXXP144-SYSVG.72@5034.5,3776.5 ; 5018.94,3738.94 ccw(c4981.39,3776.5) LQ_KXXP144-SYSVG.72@5034.5,3776.5 ; 5018.94,3738.94 ccw(c4981.39,3776.5) LQ_KXXP144-SYSVG.72@5034.5,3776.5 ; 5024.15,3744.15 cw(c5060,3708.3) LQ_KXXP144-SYSVG.72@5060,3759 ; 5024.15,3744.15 cw(c5060,3708.3) LQ_KXXP144-SYSVG.72@5060,3759 ; 5024.15,3744.15 cw(c5060,3708.3) LQ_KXXP144-SYSVG.72@5060,3759 ; 5032.6,3752.6 ccw(c5008.7,3776.5) LQ_KXXP144-SYSVG.72@5042.5,3776.5 ; 5032.6,3752.6 ccw(c5008.7,3776.5) LQ_KXXP144-SYSVG.72@5042.5,3776.5 ; 5032.6,3752.6 ccw(c5008.7,3776.5) LQ_KXXP144-SYSVG.72@5042.5,3776.5
PTB3: FFC1.14 LQ_KXXP144-SYSVG.71 | length 1167
  Bottom Layer w8: FFC1.14@4896.47,3269.98 4896.47,3641.93 5003.5,3748.96 5003.5,3823.5 LQ_KXXP144-SYSVG.71@5060,3880 ; 5010.49,3830.49 cw(c5060,3780.99) LQ_KXXP144-SYSVG.71@5060,3851 ; 5010.49,3830.49 cw(c5060,3780.99) LQ_KXXP144-SYSVG.71@5060,3851 ; 5010.49,3830.49 cw(c5060,3780.99) LQ_KXXP144-SYSVG.71@5060,3851 ; 5018.94,3838.94 ccw(c4981.39,3876.5) LQ_KXXP144-SYSVG.71@5034.5,3876.5 ; 5018.94,3838.94 ccw(c4981.39,3876.5) LQ_KXXP144-SYSVG.71@5034.5,3876.5 ; 5018.94,3838.94 ccw(c4981.39,3876.5) LQ_KXXP144-SYSVG.71@5034.5,3876.5 ; 5024.15,3844.15 cw(c5060,3808.3) LQ_KXXP144-SYSVG.71@5060,3859 ; 5024.15,3844.15 cw(c5060,3808.3) LQ_KXXP144-SYSVG.71@5060,3859 ; 5024.15,3844.15 cw(c5060,3808.3) LQ_KXXP144-SYSVG.71@5060,3859 ; 5032.6,3852.6 ccw(c5008.7,3876.5) LQ_KXXP144-SYSVG.71@5042.5,3876.5 ; 5032.6,3852.6 ccw(c5008.7,3876.5) LQ_KXXP144-SYSVG.71@5042.5,3876.5 ; 5032.6,3852.6 ccw(c5008.7,3876.5) LQ_KXXP144-SYSVG.71@5042.5,3876.5
PTB4: FFC1.15 LQ_KXXP144-SYSVG.74 | length 1033.7
  Bottom Layer w8: FFC1.15@4876.79,3269.98 4876.79,3696.79 LQ_KXXP144-SYSVG.74@4960,3780 ; 4910.49,3730.49 cw(c4960,3680.99) LQ_KXXP144-SYSVG.74@4960,3751 ; 4910.49,3730.49 cw(c4960,3680.99) LQ_KXXP144-SYSVG.74@4960,3751 ; 4910.49,3730.49 cw(c4960,3680.99) LQ_KXXP144-SYSVG.74@4960,3751 ; 4918.94,3738.94 ccw(c4881.39,3776.5) LQ_KXXP144-SYSVG.74@4934.5,3776.5 ; 4918.94,3738.94 ccw(c4881.39,3776.5) LQ_KXXP144-SYSVG.74@4934.5,3776.5 ; 4918.94,3738.94 ccw(c4881.39,3776.5) LQ_KXXP144-SYSVG.74@4934.5,3776.5 ; 4924.15,3744.15 cw(c4960,3708.3) LQ_KXXP144-SYSVG.74@4960,3759 ; 4924.15,3744.15 cw(c4960,3708.3) LQ_KXXP144-SYSVG.74@4960,3759 ; 4924.15,3744.15 cw(c4960,3708.3) LQ_KXXP144-SYSVG.74@4960,3759 ; 4932.6,3752.6 ccw(c4908.7,3776.5) LQ_KXXP144-SYSVG.74@4942.5,3776.5 ; 4932.6,3752.6 ccw(c4908.7,3776.5) LQ_KXXP144-SYSVG.74@4942.5,3776.5 ; 4932.6,3752.6 ccw(c4908.7,3776.5) LQ_KXXP144-SYSVG.74@4942.5,3776.5
PTB5: FFC1.16 LQ_KXXP144-SYSVG.73 | length 1141.8
  Bottom Layer w8: FFC1.16@4857.1,3269.98 4857.1,3702.56 4903.5,3748.96 4903.5,3823.5 LQ_KXXP144-SYSVG.73@4960,3880 ; 4910.49,3830.49 cw(c4960,3780.99) LQ_KXXP144-SYSVG.73@4960,3851 ; 4910.49,3830.49 cw(c4960,3780.99) LQ_KXXP144-SYSVG.73@4960,3851 ; 4910.49,3830.49 cw(c4960,3780.99) LQ_KXXP144-SYSVG.73@4960,3851 ; 4918.94,3838.94 ccw(c4881.39,3876.5) LQ_KXXP144-SYSVG.73@4934.5,3876.5 ; 4918.94,3838.94 ccw(c4881.39,3876.5) LQ_KXXP144-SYSVG.73@4934.5,3876.5 ; 4918.94,3838.94 ccw(c4881.39,3876.5) LQ_KXXP144-SYSVG.73@4934.5,3876.5 ; 4924.15,3844.15 cw(c4960,3808.3) LQ_KXXP144-SYSVG.73@4960,3859 ; 4924.15,3844.15 cw(c4960,3808.3) LQ_KXXP144-SYSVG.73@4960,3859 ; 4924.15,3844.15 cw(c4960,3808.3) LQ_KXXP144-SYSVG.73@4960,3859 ; 4932.6,3852.6 ccw(c4908.7,3876.5) LQ_KXXP144-SYSVG.73@4942.5,3876.5 ; 4932.6,3852.6 ccw(c4908.7,3876.5) LQ_KXXP144-SYSVG.73@4942.5,3876.5 ; 4932.6,3852.6 ccw(c4908.7,3876.5) LQ_KXXP144-SYSVG.73@4942.5,3876.5
PTB6: FFC1.17 LQ_KXXP144-SYSVG.76 | length 519.4
  Bottom Layer w8: FFC1.17@4837.42,3269.98 4837.42,3757.42 LQ_KXXP144-SYSVG.76@4860,3780
PTB7: FFC1.18 LQ_KXXP144-SYSVG.75 | length 1081.5
  Bottom Layer w8: FFC1.18@4817.73,3269.98 4817.73,3756.02 4816.5,3757.25 4816.5,3836.5 LQ_KXXP144-SYSVG.75@4860,3880 ; 4814.75,3834.75 cw(c4854.44,3795.07) LQ_KXXP144-SYSVG.75@4858.26,3851.06 ; 4814.75,3834.75 cw(c4854.44,3795.07) LQ_KXXP144-SYSVG.75@4858.26,3851.06 ; 4814.75,3834.75 cw(c4854.44,3795.07) LQ_KXXP144-SYSVG.75@4858.26,3851.06 ; 4818.94,3838.94 ccw(c4781.39,3876.5) LQ_KXXP144-SYSVG.75@4834.5,3876.5 ; 4818.94,3838.94 ccw(c4781.39,3876.5) LQ_KXXP144-SYSVG.75@4834.5,3876.5 ; 4818.94,3838.94 ccw(c4781.39,3876.5) LQ_KXXP144-SYSVG.75@4834.5,3876.5 ; 4827.19,3847.19 cw(c4856.03,3818.36) LQ_KXXP144-SYSVG.75@4858.81,3859.04 ; 4827.19,3847.19 cw(c4856.03,3818.36) LQ_KXXP144-SYSVG.75@4858.81,3859.04 ; 4827.19,3847.19 cw(c4856.03,3818.36) LQ_KXXP144-SYSVG.75@4858.81,3859.04 ; 4832.6,3852.6 ccw(c4808.7,3876.5) LQ_KXXP144-SYSVG.75@4842.5,3876.5 ; 4832.6,3852.6 ccw(c4808.7,3876.5) LQ_KXXP144-SYSVG.75@4842.5,3876.5 ; 4832.6,3852.6 ccw(c4808.7,3876.5) LQ_KXXP144-SYSVG.75@4842.5,3876.5
PTB10: FFC1.19 LQ_KXXP144-SYSVG.80 | length 948.3
  Bottom Layer w10: LQ_KXXP144-SYSVG.80@4660,3780 4710,3730 4710,3710 4798.05,3621.95 FFC1.19@4798.05,3269.98 ; LQ_KXXP144-SYSVG.80@4660,3752 cw(c4660,3684.4) 4707.8,3732.2 ; LQ_KXXP144-SYSVG.80@4660,3752 cw(c4660,3684.4) 4707.8,3732.2 ; LQ_KXXP144-SYSVG.80@4660,3752 cw(c4660,3684.4) 4707.8,3732.2 ; LQ_KXXP144-SYSVG.80@4660,3762 cw(c4660,3718.54) 4690.73,3749.27 ; LQ_KXXP144-SYSVG.80@4660,3762 cw(c4660,3718.54) 4690.73,3749.27 ; LQ_KXXP144-SYSVG.80@4660,3762 cw(c4660,3718.54) 4690.73,3749.27 ; LQ_KXXP144-SYSVG.80@4684.5,3776.5 ccw(c4735.2,3776.5) 4699.35,3740.65 ; LQ_KXXP144-SYSVG.80@4684.5,3776.5 ccw(c4735.2,3776.5) 4699.35,3740.65 ; LQ_KXXP144-SYSVG.80@4684.5,3776.5 ccw(c4735.2,3776.5) 4699.35,3740.65
PTB11: FFC1.20 LQ_KXXP144-SYSVG.79 | length 1069
  Bottom Layer w10: LQ_KXXP144-SYSVG.79@4660,3880 4615,3835 4615,3745 4778.36,3581.64 FFC1.20@4778.36,3269.98 ; 4613.25,3833.25 cw(c4658.54,3787.96) LQ_KXXP144-SYSVG.79@4659.6,3852 ; 4613.25,3833.25 cw(c4658.54,3787.96) LQ_KXXP144-SYSVG.79@4659.6,3852 ; 4613.25,3833.25 cw(c4658.54,3787.96) LQ_KXXP144-SYSVG.79@4659.6,3852 ; 4620.65,3840.65 ccw(c4584.8,3876.5) LQ_KXXP144-SYSVG.79@4635.5,3876.5 ; 4620.65,3840.65 ccw(c4584.8,3876.5) LQ_KXXP144-SYSVG.79@4635.5,3876.5 ; 4620.65,3840.65 ccw(c4584.8,3876.5) LQ_KXXP144-SYSVG.79@4635.5,3876.5 ; 4629.93,3849.93 cw(c4659.08,3820.78) LQ_KXXP144-SYSVG.79@4659.76,3862 ; 4629.93,3849.93 cw(c4659.08,3820.78) LQ_KXXP144-SYSVG.79@4659.76,3862 ; 4629.93,3849.93 cw(c4659.08,3820.78) LQ_KXXP144-SYSVG.79@4659.76,3862
PTC1: LQ_KXXP144-SYSVG.89 R4.1 | length 1120.7
  Top Layer w20: LQ_KXXP144-SYSVG.89@4160,3880 4160,3853.5 4209.5,3804 4209.5,3490.5 R4.1@4380,3320 ; LQ_KXXP144-SYSVG.89@4159.51,3876.58 ccw(c4197.59,3870.46) 4170.32,3843.19 ; LQ_KXXP144-SYSVG.89@4159.51,3876.58 ccw(c4197.59,3870.46) 4170.32,3843.19 ; LQ_KXXP144-SYSVG.89@4159.51,3876.58 ccw(c4197.59,3870.46) 4170.32,3843.19 ; LQ_KXXP144-SYSVG.89@4179.25,3873.41 ccw(c4245.3,3862.8) 4198,3815.5 ; LQ_KXXP144-SYSVG.89@4179.25,3873.41 ccw(c4245.3,3862.8) 4198,3815.5 ; LQ_KXXP144-SYSVG.89@4179.25,3873.41 ccw(c4245.3,3862.8) 4198,3815.5 ; 4354.39,3345.61 cw(c4328.79,3320) R4.1@4365,3320 ; 4354.39,3345.61 ccw(c4380,3371.21) R4.1@4380,3335 ; 4354.39,3345.61 cw(c4328.79,3320) R4.1@4365,3320 ; 4354.39,3345.61 ccw(c4380,3371.21) R4.1@4380,3335 ; 4354.39,3345.61 cw(c4328.79,3320) R4.1@4365,3320 ; 4354.39,3345.61 ccw(c4380,3371.21) R4.1@4380,3335
PTC9: 1.44LCD.17 LQ_KXXP144-SYSVG.97 | length 2256.1
  Bottom Layer w10: v1(3220,2525) 3167,2578 3093.36,2578 3025.36,2510 3004.64,2510 2960,2554.64 2960,2646.43 3849.07,3535.5 3881.93,3535.5 3912,3565.57 3912,3632 LQ_KXXP144-SYSVG.97@3960,3680 ; 3913.75,3633.75 ccw(c3869.63,3677.87) LQ_KXXP144-SYSVG.97@3932.01,3679.4 ; 3913.75,3633.75 ccw(c3869.63,3677.87) LQ_KXXP144-SYSVG.97@3932.01,3679.4 ; 3913.75,3633.75 ccw(c3869.63,3677.87) LQ_KXXP144-SYSVG.97@3932.01,3679.4 ; 3920.65,3640.65 cw(c3956.5,3604.8) LQ_KXXP144-SYSVG.97@3956.5,3655.5 ; 3920.65,3640.65 cw(c3956.5,3604.8) LQ_KXXP144-SYSVG.97@3956.5,3655.5 ; 3920.65,3640.65 cw(c3956.5,3604.8) LQ_KXXP144-SYSVG.97@3956.5,3655.5 ; 3930.25,3650.25 ccw(c3901.84,3678.66) LQ_KXXP144-SYSVG.97@3942,3679.64 ; 3930.25,3650.25 ccw(c3901.84,3678.66) LQ_KXXP144-SYSVG.97@3942,3679.64 ; 3930.25,3650.25 ccw(c3901.84,3678.66) LQ_KXXP144-SYSVG.97@3942,3679.64
PTC10: 1.44LCD.12 LQ_KXXP144-SYSVG.100 | length 2097.6
  Bottom Layer w10: v1(2725,2540) 2720,2535 2730,2535 3775,3580 LQ_KXXP144-SYSVG.100@3860,3580 ; v1@2720,2538 ccw(c2720,2569.38) 2742.19,2547.19 ; v1@2720,2538 ccw(c2720,2569.38) 2742.19,2547.19 ; v1@2720,2538 ccw(c2720,2569.38) 2742.19,2547.19 ; 3797.35,3580 cw(c3797.35,3520.85) LQ_KXXP144-SYSVG.100@3839.18,3562.68 ; 3797.35,3580 ccw(c3797.35,3639.15) LQ_KXXP144-SYSVG.100@3839.18,3597.32 ; 3797.35,3580 cw(c3797.35,3520.85) LQ_KXXP144-SYSVG.100@3839.18,3562.68 ; 3797.35,3580 ccw(c3797.35,3639.15) LQ_KXXP144-SYSVG.100@3839.18,3597.32 ; 3797.35,3580 cw(c3797.35,3520.85) LQ_KXXP144-SYSVG.100@3839.18,3562.68 ; 3797.35,3580 ccw(c3797.35,3639.15) LQ_KXXP144-SYSVG.100@3839.18,3597.32 ; 3821.49,3580 cw(c3821.49,3544.99) LQ_KXXP144-SYSVG.100@3846.25,3569.75 ; 3821.49,3580 ccw(c3821.49,3615.01) LQ_KXXP144-SYSVG.100@3846.25,3590.25 ; 3821.49,3580 cw(c3821.49,3544.99) LQ_KXXP144-SYSVG.100@3846.25,3569.75 ; 3821.49,3580 ccw(c3821.49,3615.01) LQ_KXXP144-SYSVG.100@3846.25,3590.25 ; 3821.49,3580 cw(c3821.49,3544.99) LQ_KXXP144-SYSVG.100@3846.25,3569.75 ; 3821.49,3580 ccw(c3821.49,3615.01) LQ_KXXP144-SYSVG.100@3846.25,3590.25
PTC11: 1.44LCD.19 LQ_KXXP144-SYSVG.99 | length 1725.9
  Bottom Layer w10: v1(3420,2525) 3420,2906.83 3848.67,3335.5 3881.93,3335.5 3908,3361.57 3908,3394.43 3949.07,3435.5 3981.93,3435.5 4008,3461.57 4008,3532 LQ_KXXP144-SYSVG.99@3960,3580 ; LQ_KXXP144-SYSVG.99@3963.5,3555.5 cw(c3963.5,3504.8) 3999.35,3540.65 ; LQ_KXXP144-SYSVG.99@3963.5,3555.5 cw(c3963.5,3504.8) 3999.35,3540.65 ; LQ_KXXP144-SYSVG.99@3963.5,3555.5 cw(c3963.5,3504.8) 3999.35,3540.65 ; LQ_KXXP144-SYSVG.99@3978,3579.64 ccw(c4018.16,3578.66) 3989.75,3550.25 ; LQ_KXXP144-SYSVG.99@3978,3579.64 ccw(c4018.16,3578.66) 3989.75,3550.25 ; LQ_KXXP144-SYSVG.99@3978,3579.64 ccw(c4018.16,3578.66) 3989.75,3550.25 ; LQ_KXXP144-SYSVG.99@3987.99,3579.4 ccw(c4050.37,3577.87) 4006.25,3533.75 ; LQ_KXXP144-SYSVG.99@3987.99,3579.4 ccw(c4050.37,3577.87) 4006.25,3533.75 ; LQ_KXXP144-SYSVG.99@3987.99,3579.4 ccw(c4050.37,3577.87) 4006.25,3533.75
PTC12: 1.44LCD.15 LQ_KXXP144-SYSVG.102 | length 1676.1
  Bottom Layer w10: v1(3015,2535) 3015,2635 LQ_KXXP144-SYSVG.102@3860,3480 ; 3812.2,3432.2 ccw(c3764.4,3480) LQ_KXXP144-SYSVG.102@3832,3480 ; 3812.2,3432.2 ccw(c3764.4,3480) LQ_KXXP144-SYSVG.102@3832,3480 ; 3812.2,3432.2 ccw(c3764.4,3480) LQ_KXXP144-SYSVG.102@3832,3480 ; 3820.65,3440.65 cw(c3856.5,3404.8) LQ_KXXP144-SYSVG.102@3856.5,3455.5 ; 3820.65,3440.65 cw(c3856.5,3404.8) LQ_KXXP144-SYSVG.102@3856.5,3455.5 ; 3820.65,3440.65 cw(c3856.5,3404.8) LQ_KXXP144-SYSVG.102@3856.5,3455.5 ; 3829.27,3449.27 ccw(c3798.54,3480) LQ_KXXP144-SYSVG.102@3842,3480 ; 3829.27,3449.27 ccw(c3798.54,3480) LQ_KXXP144-SYSVG.102@3842,3480 ; 3829.27,3449.27 ccw(c3798.54,3480) LQ_KXXP144-SYSVG.102@3842,3480
PTC13: 1.44LCD.18 LQ_KXXP144-SYSVG.101 | length 1259
  Bottom Layer w10: v1(3320,2525) 3320,2906.43 3838.07,3424.5 3904.5,3424.5 LQ_KXXP144-SYSVG.101@3960,3480
PTD5: LQ_KXXP144-SYSVG.113 P3.1 | length 2345.9
  Bottom Layer w20: LQ_KXXP144-SYSVG.113@3960,2880 5033.5,2880 5410.5,2503 5410.5,2356 5440,2326.5 P3.1@5440,2220 ; LQ_KXXP144-SYSVG.113@3977.29,2866.21 cw(c4010.58,2832.92) 4010.58,2880 ; LQ_KXXP144-SYSVG.113@3977.29,2866.21 cw(c4010.58,2832.92) 4010.58,2880 ; LQ_KXXP144-SYSVG.113@3977.29,2866.21 cw(c4010.58,2832.92) 4010.58,2880 ; LQ_KXXP144-SYSVG.113@3977.29,2893.79 ccw(c4010.58,2927.08) 4010.58,2880 ; LQ_KXXP144-SYSVG.113@3977.29,2893.79 ccw(c4010.58,2927.08) 4010.58,2880 ; LQ_KXXP144-SYSVG.113@3977.29,2893.79 ccw(c4010.58,2927.08) 4010.58,2880 ; P3.1@5426.19,2233.81 ccw(c5392.86,2267.14) 5440,2267.14 ; P3.1@5426.19,2233.81 ccw(c5392.86,2267.14) 5440,2267.14 ; P3.1@5426.19,2233.81 ccw(c5392.86,2267.14) 5440,2267.14 ; 5440,2267.14 ccw(c5487.14,2267.14) P3.1@5453.81,2233.81 ; 5440,2267.14 ccw(c5487.14,2267.14) P3.1@5453.81,2233.81 ; 5440,2267.14 ccw(c5487.14,2267.14) P3.1@5453.81,2233.81
PTD11: 1.44LCD.16 LQ_KXXP144-SYSVG.119 | length 1396.8
  Bottom Layer w10: v1(3120,2520) 3125,2525 3145.05,2525 3165,2505.05 3165,2502.22 3202.22,2465 3475.36,2465 3495.36,2485 3672.5,2485 3812,2624.5 3910.5,2624.5 3955,2580 LQ_KXXP144-SYSVG.119@3960,2580 ; 3912.12,2622.88 ccw(c3956.5,2667.27) LQ_KXXP144-SYSVG.119@3956.5,2604.5 ; 3912.12,2622.88 ccw(c3956.5,2667.27) LQ_KXXP144-SYSVG.119@3956.5,2604.5 ; 3912.12,2622.88 ccw(c3956.5,2667.27) LQ_KXXP144-SYSVG.119@3956.5,2604.5 ; 3915.74,2619.26 cw(c3876.47,2580) LQ_KXXP144-SYSVG.119@3932,2580 ; 3915.74,2619.26 cw(c3876.47,2580) LQ_KXXP144-SYSVG.119@3932,2580 ; 3915.74,2619.26 cw(c3876.47,2580) LQ_KXXP144-SYSVG.119@3932,2580 ; 3929.19,2605.81 ccw(c3956.5,2633.13) LQ_KXXP144-SYSVG.119@3956.5,2594.5 ; 3929.19,2605.81 ccw(c3956.5,2633.13) LQ_KXXP144-SYSVG.119@3956.5,2594.5 ; 3929.19,2605.81 ccw(c3956.5,2633.13) LQ_KXXP144-SYSVG.119@3956.5,2594.5 ; 3932.81,2602.19 cw(c3910.62,2580) LQ_KXXP144-SYSVG.119@3942,2580 ; 3932.81,2602.19 cw(c3910.62,2580) LQ_KXXP144-SYSVG.119@3942,2580 ; 3932.81,2602.19 cw(c3910.62,2580) LQ_KXXP144-SYSVG.119@3942,2580